# EAGLE board system_driver (EAGLE 7.4.0)
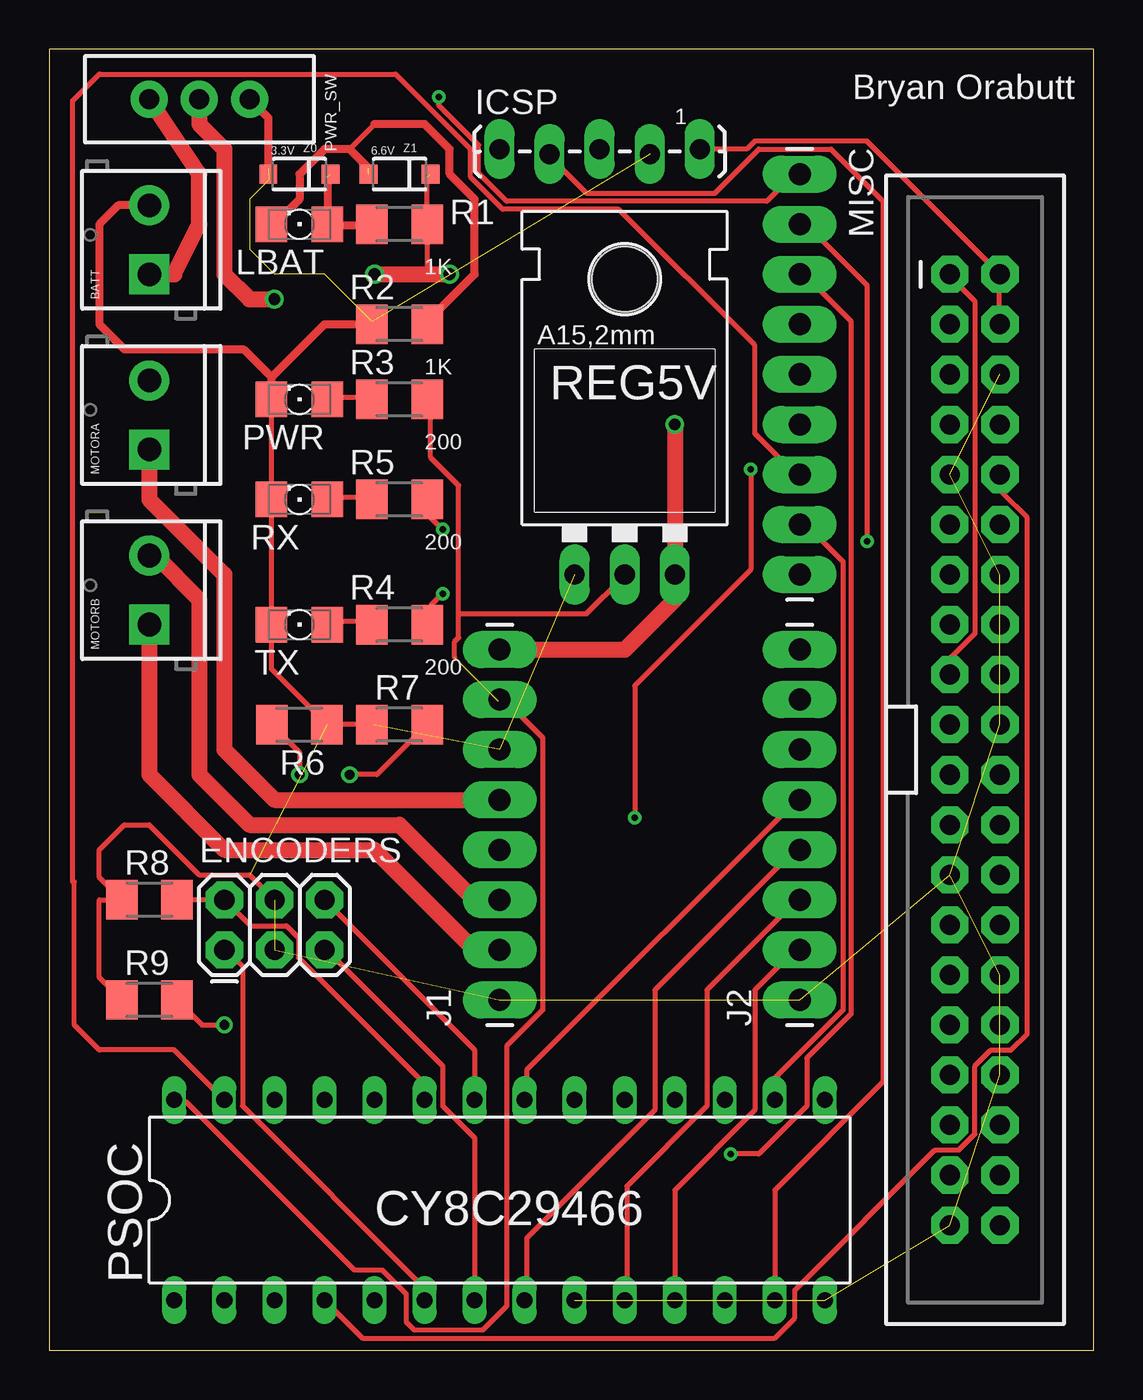
[diagram p0: board, top side]
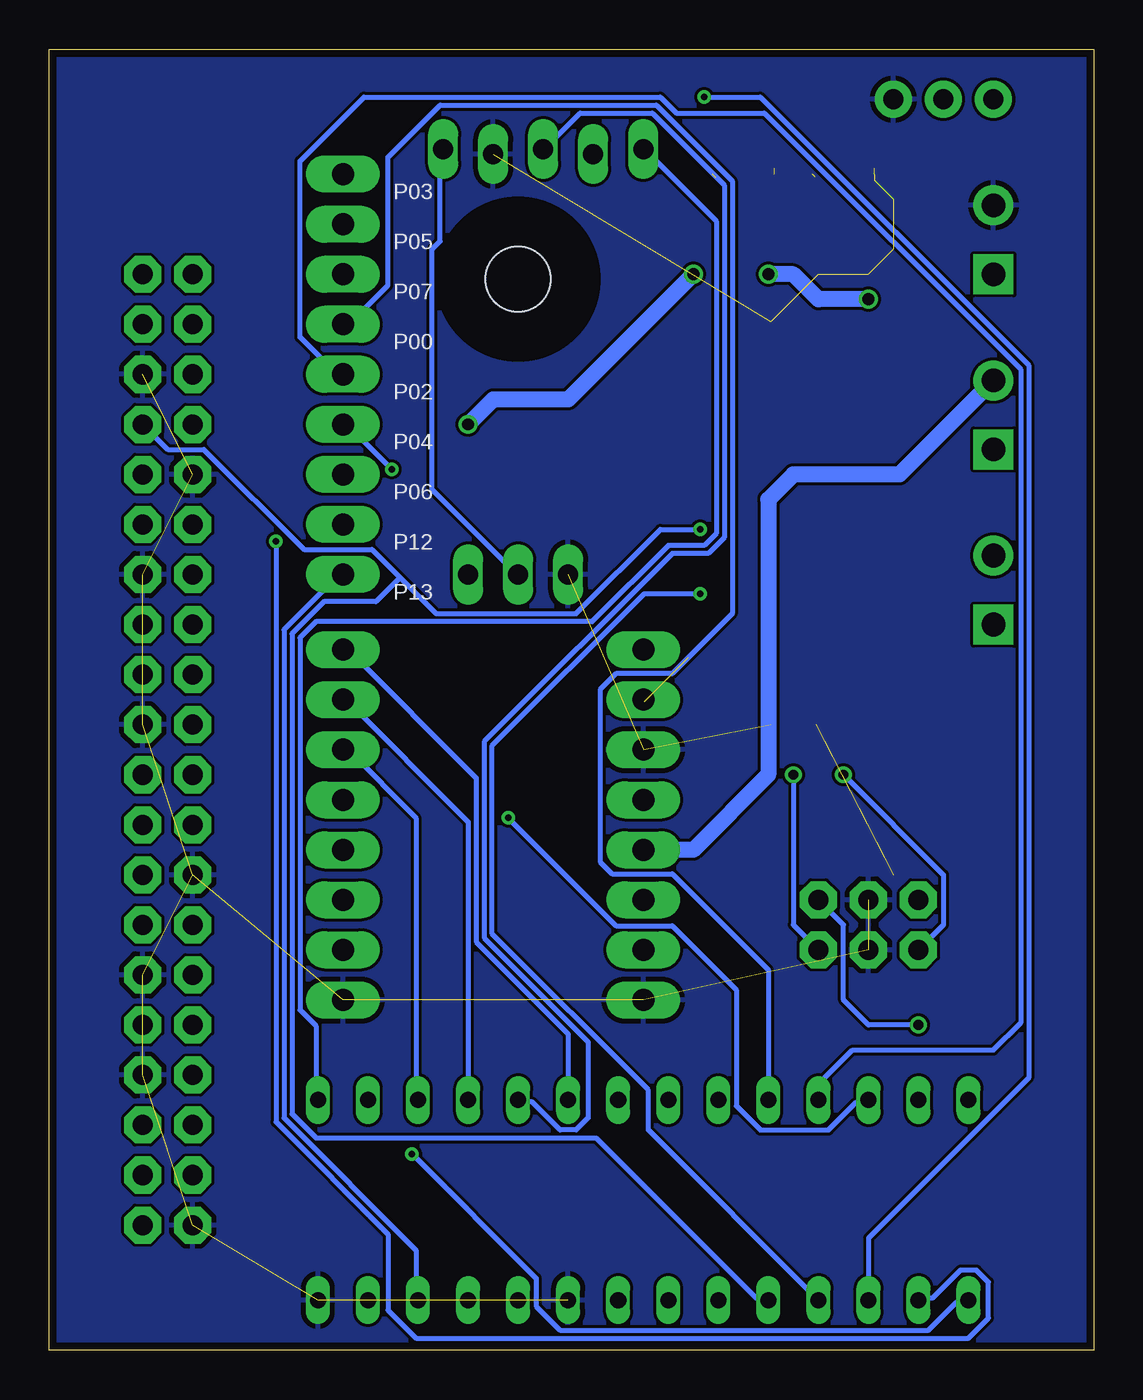
[diagram p1: board, bottom side, seen from below]

Size 53.01 x 66.03 mm. Coordinates in mm from the lower left corner, seen from the top.
Outline: 0,0 53.01,0 53.01,66.03 0,66.03 0,0
Copper layers (1*16): Top 0.0356mm / dielectric 1.5011mm / Bottom 0.0356mm
Design rules "LaenPCBOrder": minimum track width 6mil, minimum drill 13mil, track to track 6mil, track to pad 6mil, pad to pad 6mil, via to via 6mil, smd to smd 6mil, copper to edge 15mil, drill to drill 6mil, minimum pad ring 7mil, minimum via ring 7mil, stop-mask expansion 3mil, vias tented up to drill 0mil, thermal gap 10mil
Net classes: 0 default: width 0.254 mm

## Footprints (pad centres in the part's own frame; a part is rotated, then mirrored left to right if it is on the bottom)
SCREWTERMINAL-3.5MM-2 = drill 1.2 pad 2.032 square: 1 0,0 | drill 1.2 pad 2.032: 2 3.5,0
2X3 = drill 1.016 pad 1.88 octagon: 1 0,0; 2 0,2.54; 3 2.54,0; 4 2.54,2.54; 5 5.08,0; 6 5.08,2.54
1X05_LOCK_LONGPADS = drill 1.016 long: 1 0,0; 2 2.54,-0.254; 3 5.08,0; 4 7.62,-0.254; 5 10.16,0
1X08_LONGPADS = drill 1.118 pad 1.88 long: 1 0,0; 2 2.54,0; 3 5.08,0; 4 7.62,0; 5 10.16,0; 6 12.7,0; 7 15.24,0; 8 17.78,0
FKIT-LED-1206 = smd 1.6 x 1.803: A -1.422,0; C 1.422,0
1X09_LONGPADS = drill 1.118 pad 1.88 long: 1 0,0; 2 2.54,0; 3 5.08,0; 4 7.62,0; 5 10.16,0; 6 12.7,0; 7 15.24,0; 8 17.78,0; 9 20.32,0
2X20-SHROUDED = drill 1.016 pad 1.88 octagon: 1 -1.27,24.13; 2 1.27,24.13; 3 -1.27,21.59; 4 1.27,21.59; 5 -1.27,19.05; 6 1.27,19.05; 7 -1.27,16.51; 8 1.27,16.51; 9 -1.27,13.97; 10 1.27,13.97; 11 -1.27,11.43; 12 1.27,11.43; 13 -1.27,8.89; 14 1.27,8.89; 15 -1.27,6.35; 16 1.27,6.35; 17 -1.27,3.81; 18 1.27,3.81; 19 -1.27,1.27; 20 1.27,1.27; 21 -1.27,-1.27; 22 1.27,-1.27; 23 -1.27,-3.81; 24 1.27,-3.81; 25 -1.27,-6.35; 26 1.27,-6.35; 27 -1.27,-8.89; 28 1.27,-8.89; 29 -1.27,-11.43; 30 1.27,-11.43; 31 -1.27,-13.97; 32 1.27,-13.97; 33 -1.27,-16.51; 34 1.27,-16.51; 35 -1.27,-19.05; 36 1.27,-19.05; 37 -1.27,-21.59; 38 1.27,-21.59; 39 -1.27,-24.13; 40 1.27,-24.13
DIL28-4 = drill 0.813 long: 1 -16.51,-5.08; 2 -13.97,-5.08; 3 -11.43,-5.08; 4 -8.89,-5.08; 5 -6.35,-5.08; 6 -3.81,-5.08; 7 -1.27,-5.08; 8 1.27,-5.08; 9 3.81,-5.08; 10 6.35,-5.08; 11 8.89,-5.08; 12 11.43,-5.08; 13 13.97,-5.08; 14 16.51,-5.08; 15 16.51,5.08; 16 13.97,5.08; 17 11.43,5.08; 18 8.89,5.08; 19 6.35,5.08; 20 3.81,5.08; 21 1.27,5.08; 22 -1.27,5.08; 23 -3.81,5.08; 24 -6.35,5.08; 25 -8.89,5.08; 26 -11.43,5.08; 27 -13.97,5.08; 28 -16.51,5.08
SWITCH-SPDT = drill 1.016 pad 1.88: 1 0,2.54; 2 0,0; 3 0,-2.54
M1206 = smd 1.6 x 2: 1 -1.4,0; 2 1.4,0
78XXL = drill 1.016 long: GND 0,-3.81; IN -2.54,-3.81; OUT 2.54,-3.81 | hole 3.302: 0,11.176
SOD-123 = smd 0.9 x 0.95: A 1.575,0; C -1.575,0

## Placement (x,y rotation side)
BATT  [SCREWTERMINAL-3.5MM-2]  5.08,54.61 90 top
ENCODERS  [2X3]  8.89,20.32 0 top
ICSP  [1X05_LOCK_LONGPADS]  22.86,60.96 0 top
J1  [1X08_LONGPADS]  22.86,17.78 90 top
J2  [1X08_LONGPADS]  38.1,17.78 90 top
LBAT  [FKIT-LED-1206]  12.7,57.15 180 top
MISC  [1X09_LONGPADS]  38.1,59.69 270 top
MOTORA  [SCREWTERMINAL-3.5MM-2]  5.08,45.72 90 top
MOTORB  [SCREWTERMINAL-3.5MM-2]  5.08,36.83 90 top
PI  RASPBERRYPI-40-PIN-GPIO  [2X20-SHROUDED]  46.99,30.48 0 top
PSOC  [DIL28-4]  22.86,7.62 0 top
PWR  [FKIT-LED-1206]  12.7,48.26 180 top
PWR_SW  [SWITCH-SPDT]  7.62,63.5 90 top
R1  1K  [M1206]  17.78,57.15 0 top
R2  1K  [M1206]  17.78,52.07 0 top
R3  200  [M1206]  17.78,48.26 0 top
R4  200  [M1206]  17.78,36.83 0 top
R5  200  [M1206]  17.78,43.18 0 top
R6  10K  [M1206]  12.7,31.75 180 top
R7  10K  [M1206]  17.78,31.75 0 top
R8  10K  [M1206]  5.08,22.86 0 top
R9  10K  [M1206]  5.08,17.78 0 top
REG5V  L7805  [78XXL]  29.21,43.18 0 top
RX  [FKIT-LED-1206]  12.7,43.18 180 top
TX  [FKIT-LED-1206]  12.7,36.83 180 top
Z0  3.3V  [SOD-123]  12.7,59.69 180 top
Z1  6.6V  [SOD-123]  17.78,59.69 180 top

## Library data of the parts
BATT MOTORA MOTORB = SparkFun-Connectors; PROD_ID: CONN-08399
ENCODERS = SparkFun-Connectors; PROD_ID: CONN-11566
ICSP J1 J2 MISC = SparkFun-Connectors
LBAT PWR RX TX = SparkFun-LED
PI = SparkFun-Boards
PSOC = ic-package
PWR_SW = SparkFun-Electromechanical; PROD_ID: SWCH-08261
R1-R9 = resistor
REG5V = SparkFun-PowerIC
Z0 Z1 = SparkFun-DiscreteSemi; PROD_ID: DIO-12440

## Nets
3.3V: PI.1 PI.17
AIN1: J2.6 PSOC.17
AIN2: J2.7 PSOC.18
AO1: J1.5 MOTORA.1
AO2: J1.4 MOTORA.2
BIN1: J2.4 PSOC.8
BIN2: J2.3 PSOC.10
BO1: J1.2 MOTORB.1
BO2: J1.3 MOTORB.2
CE0: PI.24
CE1: PI.26
ENC1A: ENCODERS.2 PSOC.23 R8.2
ENC1B: ENCODERS.6 PSOC.22 R9.2
ENC2A: ENCODERS.1 PSOC.6 R6.2
ENC2B: ENCODERS.5 PSOC.7 R7.2
GND: BATT.2 ENCODERS.3 ENCODERS.4 ICSP.4 J1.1 J1.6 J2.1 PI.6 PI.9 PI.14 PI.20 PI.25 PI.30 PI.34 PI.39 PSOC.9 PSOC.14 PWR.C PWR_SW.3 R2.1 R6.1 R7.1 R8.1 R9.1 REG5V.IN RX.C TX.C Z0.A
GP4: PI.7
GP5: PI.29
GP6: PI.31
GP12: PI.32
GP13: PI.33
GP16: PI.36
GP17: PI.11
GP18: PI.12
GP19: PI.35
GP20: PI.38
GP21: PI.40
GP22: PI.15
GP23: PI.16
GP24: PI.18
GP25: PI.22
GP26: PI.37
GP27: PI.13
ID_SC: PI.28
ID_SD: PI.27
MISC0: MISC.1 PSOC.3
MISC1: MISC.2 PSOC.2
MISC2: MISC.3 PSOC.1
MISC3: MISC.4 PSOC.24
MISC4: MISC.5 PSOC.25
MISC5: MISC.6 PSOC.26
MISC6: MISC.7 PSOC.27
MISC7: MISC.8 PSOC.16
MISC8: MISC.9 PSOC.12
MOSI: PI.19
N$1: LBAT.A R1.1 Z0.C
N$2: LBAT.C R2.2 Z1.A
N$3: PWR.A R3.1
N$4: R4.1 TX.A
N$5: R5.1 RX.A
PI_SCL: PI.5
PI_SDA: PI.3
PSCK: ICSP.2 PSOC.13
PSDA: ICSP.1 PSOC.15
PWMA: J2.8 PSOC.20
PWMB: J2.2 PSOC.11
REGIN: J1.8 PWR_SW.2 R1.2 REG5V.OUT Z1.C
RX: PI.8 PSOC.5 R5.2
STDBY: J2.5 PSOC.21
TX: PI.10 PSOC.4 R4.2
V+: BATT.1 PWR_SW.1
VCC: ICSP.5 J1.7 PI.2 PI.4 PSOC.28 R3.2 REG5V.GND
XRES: ICSP.3 PSOC.19

## Tracks (layer width: path | path; a pad name or v marks a point on that pad's centre or on a via)
3.3V
  Top 0.254: PI.17 45.77,34.34 45.77,35.15 46.99,36.37 46.99,53.24 45.77,54.46 PI.1
AIN1
  Bottom 0.254: J2.6 37.85,30.48 34.39,27.03 34.39,12.8 PSOC.17
AIN2
  Bottom 0.254: PSOC.18 31.75,26.82 38.05,33.12 J2.7
AO1
  Top 0.813: MOTORA.1 5.08,43.18 8.89,39.37 8.89,30.48 11.43,27.94 J1.5
AO2
  Bottom 0.813: MOTORA.2 9.85,44.45 15.24,44.45 16.51,43.18 16.51,29.21 20.32,25.4 J1.4
BIN1
  Top 0.254: J2.4 37.85,25.4 30.73,18.29 30.73,12.19 24.23,5.69 24.23,2.64 PSOC.8
BIN2
  Top 0.254: PSOC.10 29.31,2.64 29.31,8.33 33.38,12.4 33.38,18.29 38.05,22.96 J2.3
BO1
  Top 0.813: MOTORB.1 5.08,29.21 8.89,25.4 16.51,25.4 21.59,20.32 J1.2
BO2
  Top 0.813: MOTORB.2 5.39,40.33 7.62,38.1 7.62,29.21 10.16,26.67 17.78,26.67 21.59,22.86 J1.3
ENC1A
  Top 0.254: PSOC.23 18.95,12.8 18.95,13.61 12.65,19.91 12.65,20.93 12.04,21.54 10.21,21.54 ENCODERS.2 R8.2 6.35,22.86
ENC1B  (via drill 0.5)
  Top 0.254: PSOC.22 21.59,15.24 ENCODERS.6 | R9.2 7.75,16.51 v8.89,16.51
  Bottom 0.254: v8.89,16.51 11.43,16.51 12.7,17.78 12.7,21.59 ENCODERS.6
ENC2A  (via drill 0.5)
  Top 0.254: PSOC.6 18.95,2.64 18.95,3.25 9.8,12.4 9.8,19.51 8.99,20.32 ENCODERS.1 | R6.2 12.7,30.35 v12.7,29.21
  Bottom 0.254: v12.7,29.21 7.62,24.13 7.62,21.59 ENCODERS.1
ENC2B  (via drill 0.5)
  Top 0.254: PSOC.7 21.59,10.77 19.96,12.4 19.96,14.43 14.07,20.32 ENCODERS.5 | R7.2 16.64,29.21 v15.24,29.21
  Bottom 0.254: v15.24,29.21 15.24,21.59 ENCODERS.5
GND  (24 unrouted)
  Top 0.254: PWR.C RX.C TX.C 11.28,34.57 R6.1 R7.1 | R9.1 2.54,18.92 2.54,22.86 R8.1 2.54,24 2.54,25.4 3.81,26.67 5.08,26.67 7.62,24.13 10.16,24.13 ENCODERS.4 | R2.1 16.38,52.2
  Top 0.406: PWR.C 11.28,49.38 | BATT.2 3.5,58.11 2.54,57.15 2.54,52.07 3.81,50.8 9.86,50.8 11.28,49.38 | 11.28,49.38 13.97,52.07 R2.1 | 11.12,59.99 11.12,62.54 PWR_SW.3
  pour Bottom: 0,66.04 53.34,66.04 53.34,0 0,0
MISC0  (via drill 0.33)
  Top 0.254: v19.76,63.6 19.76,63.2 21.79,61.16 21.79,59.74 23.22,58.32 36.42,58.32 37.64,59.54 38.05,59.54 MISC.1
  Bottom 0.254: PSOC.3 11.43,5.69 3.3,13.82 3.3,49.99 16.92,63.6 v19.76,63.6
MISC1  (via drill 0.33)
  Top 0.254: v41.5,41.05 41.5,54.05 38.25,57.3 MISC.2
  Bottom 0.254: v41.5,41.05 41.5,11.58 35.81,5.89 35.81,2.03 34.39,0.61 6.35,0.61 5.33,1.63 5.33,3.45 5.94,4.06 6.76,4.06 8.18,2.64 8.79,2.64 PSOC.2
MISC2  (via drill 0.33)
  Top 0.254: v34.59,9.96 36.02,9.96 38.46,12.4 38.46,14.83 40.69,17.07 40.69,52.22 38.25,54.66 MISC.3
  Bottom 0.254: v34.59,9.96 28.3,3.66 28.3,2.24 27.08,1.02 8.38,1.02 6.96,2.44 6.35,2.44 PSOC.1
MISC3
  Bottom 0.254: PSOC.24 16.51,19.3 21.39,24.18 24.44,24.18 25.04,24.79 25.04,33.53 24.23,34.34 21.39,34.34 18.34,37.39 18.34,59.33 22.2,63.2 33.17,63.2 35.81,60.55 35.81,54.05 37.64,52.22 38.05,52.22 MISC.4
MISC4
  Bottom 0.254: PSOC.25 13.87,12.8 13.87,13.61 12.24,15.24 5.08,15.24 3.71,16.61 3.71,49.78 16.71,62.79 21.18,62.79 22,63.6 37.03,63.6 40.28,60.35 40.28,51.41 38.25,49.38 MISC.5
MISC5  (via drill 0.33)
  Top 0.254: v29.72,27.03 29.72,33.73 35.61,39.62 v35.61,44.7
  Bottom 0.254: v29.72,27.03 24.23,21.54 21.39,21.54 18.14,18.29 18.14,12.4 16.92,11.18 13.46,11.18 12.04,12.6 11.43,12.6 PSOC.26 | v35.61,44.7 38.05,47.14 MISC.6
MISC6
  Top 0.254: MISC.7 38.05,44.3 35.81,46.53 35.81,51 28.91,57.91 23.01,57.91 21.39,59.54 21.39,60.96 17.58,64.77 2.54,64.77 1.17,63.4 1.17,23.77 1.27,23.77 1.27,16.51 2.54,15.24 6.35,15.24 PSOC.27
MISC7
  Top 0.254: PSOC.16 36.83,13.82 40.28,17.27 40.28,40.03 38.25,42.06 MISC.8
MISC8
  Bottom 0.254: PSOC.12 34.39,2.64 34.39,5.08 41.1,11.79 41.1,36.58 38.25,39.42 MISC.9
N$1  (1 unrouted)
  Top 0.254: 16.31,57.1 R1.1 16.33,57.1 | 14.27,57.1 LBAT.A
  Top 0.406: 14.12,59.54 LBAT.A | 14.27,57.1 16.33,57.1
N$2  (1 unrouted)
  Top 0.254: 11.23,57.35 11.23,57.3 LBAT.C 11.43,57.15 | R2.2 19.18,52.2 | 16.51,62.23 15.24,60.96
  Top 0.406: 16.2,59.99 15.24,60.96 13.97,60.96 12.7,59.69 12.7,58.42 11.43,57.15 | 19.18,52.2 21.59,54.61 21.59,58.42 20.32,59.69 20.32,60.96 19.05,62.23 16.51,62.23
N$3
  Top 0.254: PWR.A 14.27,48.36 16.31,48.36 R3.1
N$4
  Top 0.254: TX.A 14.27,36.98 16.31,36.98 R4.1
N$5
  Top 0.254: RX.A 14.27,43.28 16.31,43.28 R5.1
PSCK
  Top 0.254: PSOC.13 36.83,8.13 42.32,13.61 42.32,58.32 39.67,60.96 36.02,60.96 33.78,58.73 27.28,58.73 25.45,60.55 ICSP.2
PSDA
  Bottom 0.254: PSOC.15 39.47,12.8 39.47,16.46 40.28,17.27 40.28,36.17 39.47,36.98 25.45,36.98 21.59,40.84 19.76,40.84 19.15,41.45 19.15,57.3 22.81,60.96 ICSP.1
PWMA
  Bottom 0.254: PSOC.20 26.67,16.05 31.34,20.73 31.34,29.06 37.85,35.56 J2.8
PWMB
  Top 0.254: PSOC.11 31.75,8.13 35.81,12.19 35.81,18.29 37.85,20.32 J2.2
REGIN  (via drill 0.6)  (1 unrouted)
  Top 0.254: 19.18,59.51 R1.2 19.18,54.74 19.05,54.61
  Top 0.813: PWR_SW.2 7.62,62.23 8.89,60.96 8.89,54.61 10.16,53.34 v11.43,53.34 | v16.51,54.61 19.05,54.61 v20.32,54.61 | v31.75,46.99 REG5V.OUT 31.75,38.1 29.21,35.56 J1.8
  Bottom 0.813: v11.43,53.34 13.97,53.34 15.24,54.61 v16.51,54.61 | v20.32,54.61 26.67,48.26 30.48,48.26 v31.75,46.99
RX  (via drill 0.33)
  Top 0.254: v19.96,41.66 19.36,42.27 19.36,43.08 R5.2
  Bottom 0.254: v19.96,41.66 22,41.66 26.26,37.39 33.38,37.39 35.2,39.22 | 35.2,39.22 36.63,40.64 40.08,40.64 45.16,45.72 46.99,45.72 PI.8 | 35.2,39.22 36.42,38 39.06,38 40.69,36.37 40.69,11.99 39.47,10.77 25.25,10.77 17.12,2.64 16.51,2.64 PSOC.5
STDBY
  Top 0.254: PSOC.21 24.23,12.8 24.23,14.22 38.05,28.04 J2.5
TX  (via drill 0.33)
  Top 0.254: v19.96,38.41 19.36,37.79 19.36,36.98 R4.2 | PSOC.4 15.9,0.61 36.83,0.61 37.85,1.63 37.85,3.05 44.96,10.16 46.18,10.16 46.99,10.97 46.99,14.43 47.8,15.24 48.82,15.24 49.63,16.05 49.63,42.27 48.41,43.48 48.41,44.3 PI.10
  Bottom 0.254: v19.96,38.41 22.81,38.41 30.53,30.68 30.53,21.13 22.61,13.21 22.61,11.18 PSOC.4
V+
  Top 0.813: BATT.1 6.35,54.61 7.62,57.15 7.62,59.69 PWR_SW.1
VCC  (1 unrouted)
  Top 0.254: ICSP.5 35.41,60.96 35.81,61.37 41.5,61.37 PI.2 48.21,54.46 48.21,52.22 PI.4 | 20.78,37.39 20.78,36.17 20.57,35.97 20.57,35.15 | 20.78,37.39 20.78,43.89 19.36,45.31 19.36,48.16 R3.2 | 22.81,32.92 J1.7 23.01,33.12 25.04,31.09 25.04,17.27 23.22,15.44 23.22,2.24 22,1.02 18.54,1.02 18.14,1.42 18.14,2.85 16.92,4.06 15.49,4.06 6.96,12.6 6.35,12.6 PSOC.28 | 20.78,37.39 27.28,37.39 29.11,39.22 REG5V.GND
  Bottom 0.254: ICSP.5 33.17,60.96 33.17,56.29 33.58,55.88 33.58,43.69 29.31,39.42 REG5V.GND
XRES
  Bottom 0.254: PSOC.19 29.11,12.6 28.5,12.6 27.08,11.18 26.26,11.18 25.65,11.79 25.65,15.65 30.94,20.93 30.94,30.89 21.39,40.44 19.56,40.44 18.75,41.25 18.75,59.13 22.4,62.79 26.06,62.79 27.89,60.96 ICSP.3

## Text on the board
tPlace: Bryan Orabutt | 1 | CY8C29466
bPlace: P03 | P05 | P07 | P00 | P02 | P04 | P06 | P12 | P13